# Altium PCB 继电器程控V2_3级.PcbDoc
Units mm, origin at the board's own origin, x right, y up, seen from the top; angles counter-clockwise.
Board outline 58 x 38 mm, 2 copper layers (Top Layer, Bottom Layer); 53 components, 31 nets, 148 pads, 0 vias.
Unrouted connection lines stored in the file: 108.
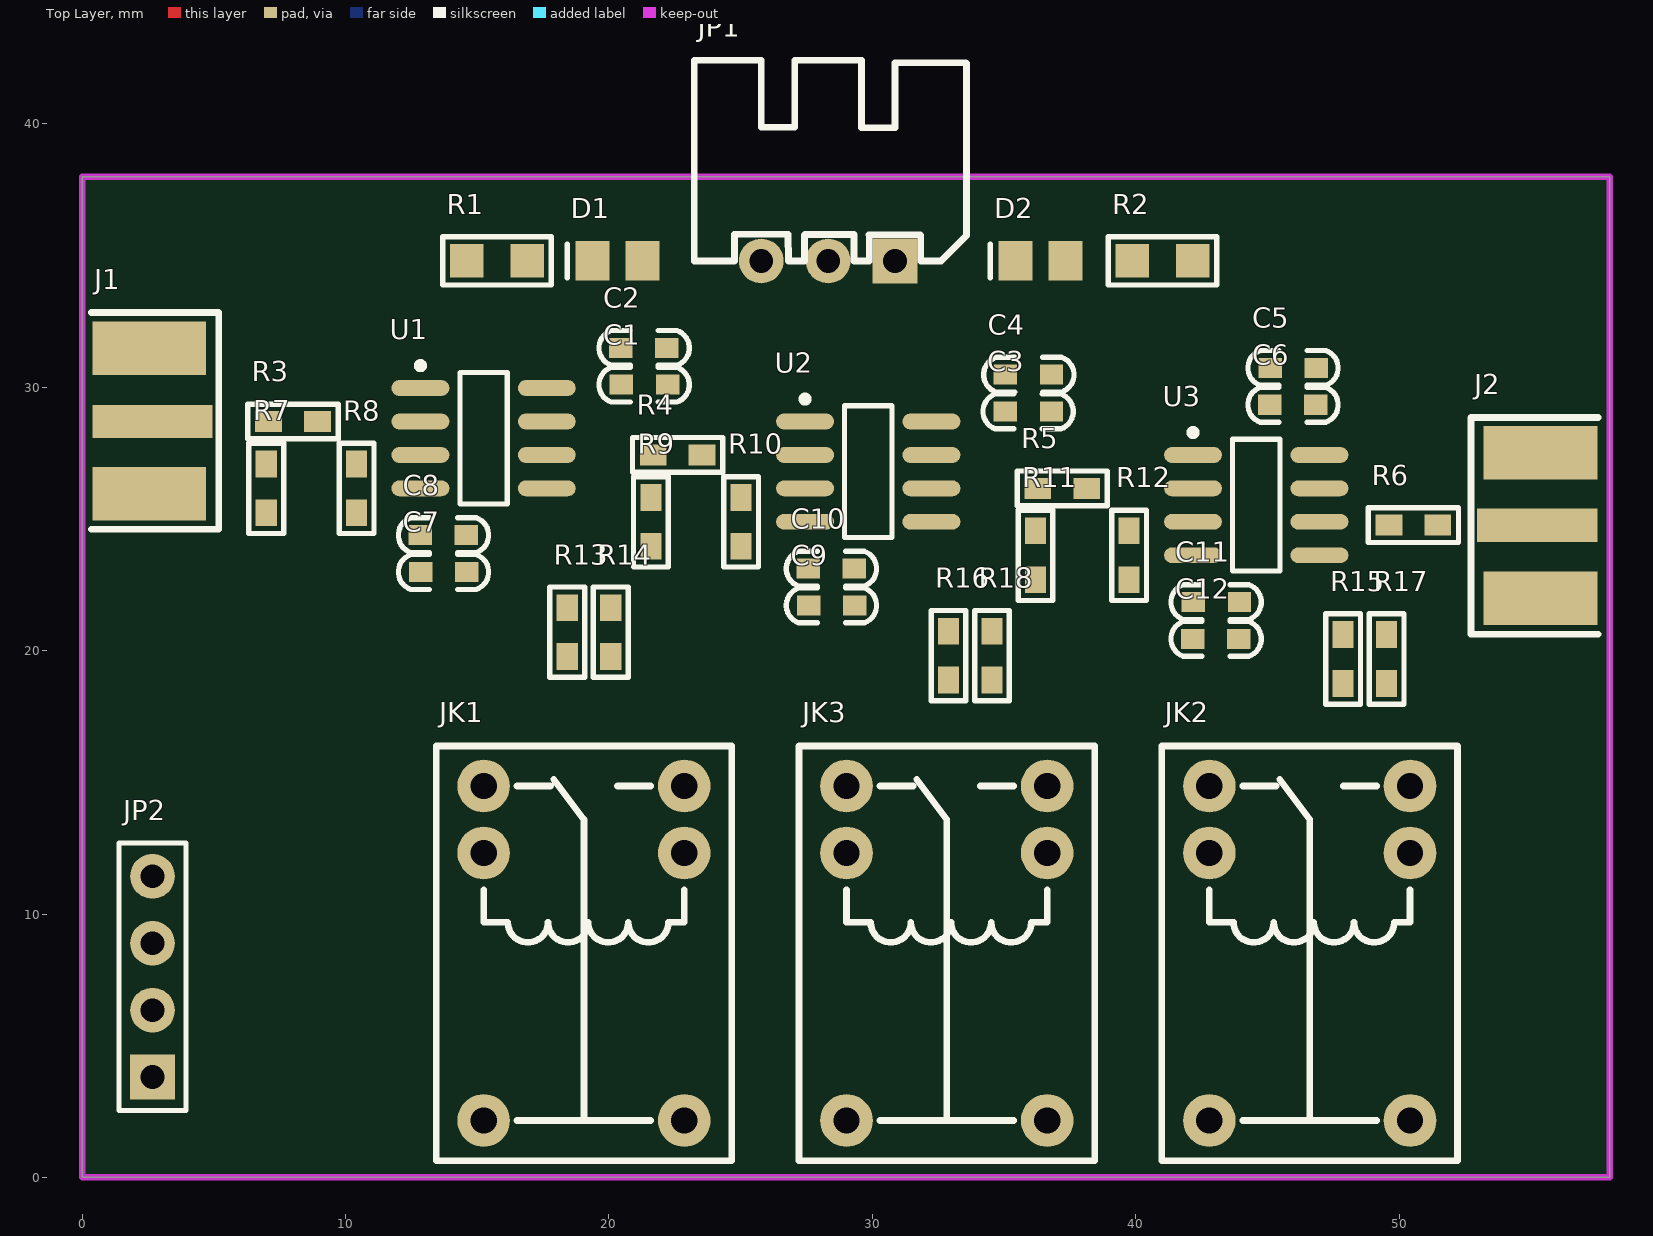
[diagram p0: Top Layer view]
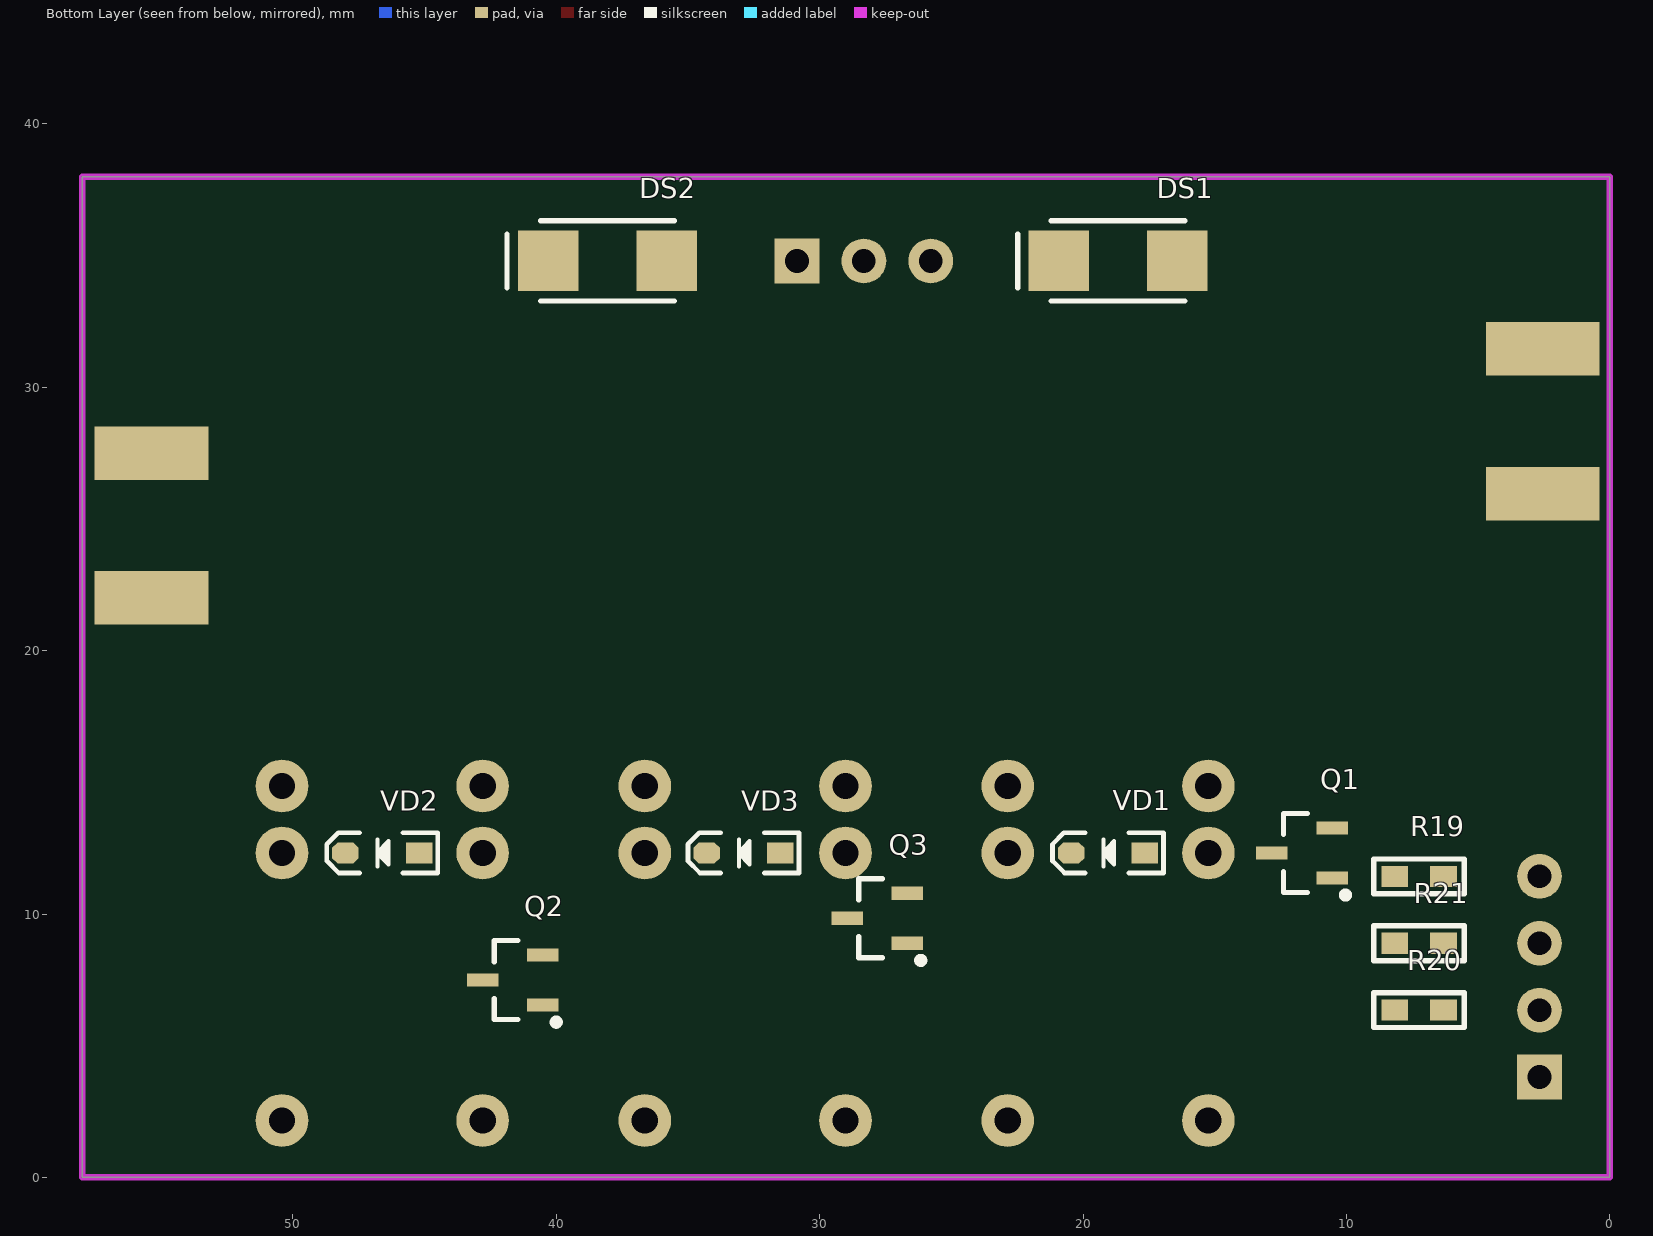
[diagram p1: Bottom Layer view, seen from below]

## Layer stack, top to bottom
Top Solder: solder mask 0.0102, Solder Resist, Dk 3.5
Top Layer: signal copper 0.0356
Dielectric 1: dielectric 0.32, FR-4, Dk 4.8
Bottom Layer: signal copper 0.0356
Bottom Solder: solder mask 0.0102, Solder Resist, Dk 3.5

## Board outline
0,0 0,38 58,38 58,0

## Design rules (kind name [scope] priority, off if disabled: settings)
Clearance [All] p1: gap=0.254 ignorepadtopadclearanceinfootprint=FALSE except(0: Arc-Hole Track-Hole SMDPad-Hole THPad-Hole Via-Hole Fill-Hole Poly-Text Poly-Hole Region-Hole Text-Hole; 0.508: Arc-Poly Track-Poly SMDPad-Poly THPad-Poly Via-Poly Fill-Poly Poly-Poly)
MinimumSolderMaskSliver [All] p1: minsoldermaskwidth=0
PolygonConnect [All] p1: connectstyle=Relief reliefconductorwidth=0.254 reliefentries=4 polygonreliefangle="90 Angle" airgapwidth=0.254
RoutingVias [All] p1: holewidth=0.711 width=1.27 viastyle="Through Hole" minholewidth=0.711 minwidth=1.27 maxholewidth=0.711 maxwidth=1.27
SilkToSilkClearance [All] p1: silktosilkclearance=0
SilkToSolderMaskClearance [IsPad] p1: minsilkscreentomaskgap=0 clearancetoexposedcopper=TRUE
SolderMaskExpansion [All] p1: expansion=0.102
Width [All] p1: maxlimit=2.54 minlimit=0.025 preferedwidth=0.254
27 further rules are at their usual default settings.

## Components (designator, comment, footprint, x,y, rotation, side; value= is the part's Value field where it differs from the comment)
C1 "104" "C 0603" 21.336,30.099 r180 top
C2 "1uF" "C 0603" 21.336,31.496 r0 top
C3 "104" "C 0603" 35.916,29.083 r180 top
C4 "1uF" "C 0603" 35.941,30.48 r0 top
C5 "104" "C 0603" 45.974,30.734 r180 top
C6 "1uF" "C 0603" 45.974,29.337 r0 top
C7 "104" "C 0603" 13.716,22.987 r180 top
C8 "1uF" "C 0603" 13.716,24.384 r0 top
C9 "104" "C 0603" 28.448,21.717 r180 top
C10 "1uF" "C 0603" 28.448,23.114 r0 top
C11 "104" "C 0603" 43.053,21.844 r180 top
C12 "1uF" "C 0603" 43.053,20.447 r0 top
D1 "LED" LED_0805 20.32,34.798 r180 top
D2 "LED" LED_0805 36.383,34.798 r180 top
DS1 "D Schottky" DIODE-SMA 18.669,34.798 r0 bottom
DS2 "D Schottky" DIODE-SMA 38.064,34.798 r0 bottom
J1 "COAX" MCX5.08-5-H 2.667,28.702 r0 top
J2 "COAX" MCX5.08-5-H 55.245,24.765 r180 top
JK1 "HK4100F-DC5V-SHG" HK4100F 19.05,8.509 r270 top
JK2 "HK4100F-DC5V-SHG" HK4100F 46.609,8.509 r270 top
JK3 "HK4100F-DC5V-SHG" HK4100F 32.829,8.509 r270 top
JP1 "HDR-1X3" XH2.54-3P_H 30.861,34.798 r180 top
JP2 "HDR-1X4" HDR-1X4 2.667,3.81 r90 top
Q1 "S9013" SOT23-3N 11.684,12.319 r90 bottom
Q2 "S9013" SOT23-3N 41.656,7.493 r90 bottom
Q3 "S9013" SOT23-3N 27.813,9.84 r90 bottom
R1 "1K" "R 0805" 15.748,34.798 r180 top
R2 "1K" "R 0805" 41.021,34.798 r180 top
R3 "200" "R 0603" 8.001,28.702 r180 top
R4 "1K" "R 0603" 22.606,27.432 r180 top
R5 "1K" "R 0603" 37.211,26.162 r180 top
R6 "50" "R 0603" 50.546,24.765 r180 top
R7 "67" "R 0603" 6.985,26.162 r270 top
R8 "146" "R 0603" 10.414,26.162 r90 top
R9 "67" "R 0603" 21.59,24.892 r270 top
R10 "146" "R 0603" 25.019,24.892 r270 top
R11 "67" "R 0603" 36.195,23.622 r270 top
R12 "146" "R 0603" 39.751,23.622 r270 top
R13 "800" "R 0603" 18.415,20.701 r90 top
R14 "1K" "R 0603" 20.066,20.701 r90 top
R15 "1K" "R 0603" 47.879,19.685 r270 top
R16 "500" "R 0603" 32.893,19.812 r270 top
R17 "5K" "R 0603" 49.53,19.685 r270 top
R18 "5K" "R 0603" 34.544,19.812 r270 top
R19 "1K" "R 0603" 7.239,11.43 r0 bottom
R20 "1K" "R 0603" 7.239,6.35 r0 bottom
R21 "1K" "R 0603" 7.239,8.89 r0 bottom
U1 "OPA690" SOIC8_N 15.24,28.067 r0 top
U2 "OPA690" SOIC8_N 29.845,26.797 r0 top
U3 "OPA690" SOIC8_N 44.577,25.527 r0 top
VD1 "1N4148" SOD-323 19.05,12.319 r0 bottom
VD2 "1N4148" SOD-323 46.609,12.319 r0 bottom
VD3 "1N4148" SOD-323 32.893,12.319 r0 bottom

## Footprints (in the part's own frame and the unit in brackets; to place one, negate y for a bottom-side part, rotate by r counter-clockwise, add the part's x,y. Pads: shape width x height; smd on the part's side, far side on the other; paste and mask are expansions set on the pad)
"C 0603" [mil] "无极性贴片电容"
  rect 35x30 smd: 1(-35,0) 2(34,0)
  silkscreen extent -67,-26 67,26, body extent -31,-16 31,16, height 32
DIODE-SMA [mm] "贴片二极管"
  rect 2.3x2.3 smd: 1(-2.25,0) 2(2.25,0)
  silkscreen extent -2.54,-1.52 3.81,1.52, body extent -2.92,-1.4 2.92,1.4, height 3
HDR-1X4 [mm] "排针，4脚"
  rect 1.7x1.7 hole 0.9: 1(0,0)
  round 1.7 hole 0.9: 2(2.54,0) 3(5.08,0) 4(7.62,0)
  silkscreen extent -1.27,-1.27 8.89,1.27, body extent -1.27,-1.27 8.89,1.27, height 8.5
HK4100F [mm] "继?"
  round 2 hole 1: 1(-3.81,3.81) 2(-3.81,-3.81) 3(6.35,3.81) 3(6.35,-3.81) 4(-6.35,3.81) 5(-6.35,-3.81)
  silkscreen extent -7.87,-5.61 7.87,5.61, body extent -7.75,-5.5 7.75,5.5, height 12.2
LED_0805 [mm] "贴片二极管"
  rect 1.3x1.5 smd: 1(-0.95,0) 2(0.95,0)
  silkscreen extent 1.91,-0.63 1.91,0.64
MCX5.08-5-H [mil]
  rect 180x50 smd: 1(0,0)
  rect 170x80 smd: 2(-5,109.25) 5(-5,-108.27)
  rect 170x80 smd far side: 3(-5,108.66) 4(-5,-107.87)
  silkscreen extent -92,-161 99,163, body extent -93,-132 80,134, height 39
"R 0603" [mil] "1/10W贴片电阻"
  rect 40x31.5 smd: 1(-36.5,0) 2(36.5,0)
  silkscreen extent -68,-26 68,26, body extent -31,-16 32,16, height 16
"R 0805" [mil] "1/8W贴片电阻"
  rect 50x50 smd: 1(-45,0) 2(45,0)
  silkscreen extent -81,-36 81,36, body extent -39,-25 39,25, height 20
SOD-323 [mm] "1.8x1.3X0.9mm（长宽高，不包括引脚）"
  rect 1x0.8 smd: 1(-1.4,0)
  oct 1x0.8 smd: 2(1.4,0)
  silkscreen extent -2.11,-0.76 2.11,0.76, body extent -1.34,-0.63 1.31,0.67, height 1
SOIC8_N [mm] "8-Pin Small Outline Integrated Circuit Package (SOIC8), IPC Medium Density"
  oval 2.2x0.6 smd: 1(-2.4,1.905) 2(-2.4,0.635) 3(-2.4,-0.635) 4(-2.4,-1.905) 5(2.4,-1.905) 6(2.4,-0.635) 7(2.4,0.635) 8(2.4,1.905)
  silkscreen extent -2.52,-2.5 0.9,2.88, body extent -1.95,-2.45 1.95,2.45, height 1.75
SOT23-3N [mm] "3x1.3x1mm(长宽高)"
  rect 0.5x1.2 smd: 1(-0.95,-1.143) 2(0.95,-1.143) 3(0,1.143)
  silkscreen extent -1.72,-1.78 1.5,0.7, body extent -1.5,-1.2 1.5,1.2, height 1.05
XH2.54-3P_H [mm] "接插件，3P"
  rect 1.7x1.7 hole 0.9: 1(0,0)
  round 1.7 hole 0.9: 2(2.54,0) 3(5.08,0)
  silkscreen extent -2.72,-7.62 7.62,0, body extent -2.5,-7.35 7.58,0.35, height 5.73

## Part data
C1 C2 C3 C4 C5 C6 C7 C8 C9 C10 C11 C12: library part C, "无极性贴片电容"
D1 D2: "发光二极管", LatestRevisionDate=08-Jul-2005, LatestRevisionNote="Mech Layer 1 removed.", PackageReference=LED, Published=8-Jun-2000, Publisher="Altium Limited"
DS1 DS2: "Schottky Diode", Code_JEDEC=DO-214-AA, LatestRevisionDate=17-Jul-2002, LatestRevisionNote="Re-released for DXP Platform.", PackageDescription="DO-214-AA/SMB; 2 C-Bend Leads; Body 5.3 x 3.6 mm, inc. leads (LxW)", PackageReference=SMB, Published=8-Jun-2000, Publisher="Altium Limited"
JK1 JK2 JK3: library part HK4100F, "单路双控继电器"
JP1: library part "Header 3", "3P接插件", BOM名称=3P接, 学习资源=www.ooocke.
JP2: library part "Header 4", "4P接插件"
Q1 Q2 Q3: library part 9013-SMD, "低频放大-NPN型"
R1 R2 R3 R4 R5 R6 R7 R8 R9 R10 R11 R12 R13 R14 R15 R16 R17 R18 R19 R20 R21: library part R, "贴片电阻"
U1 U2 U3: library part OPA690ID, "具有禁用功能的宽带电压反馈运算放大器"
VD1 VD2 VD3: "高速开关二极管"

## Nets (pads, with @x,y where several pads share a name; then routed paths per layer and width w, separated by ;. In a path a pad name is that pad's centre, name@x,y a point inside that pad or via, vN(x,y) a via of type N, cw(c..) or ccw(c..) an arc to the next point about the centre after c; other vN are vias at no path point)
CON1: JP2.4 R19.1
CON2: JP2.3 R21.1
CON3: JP2.2 R20.1
GND: C1.1 C2.2 C3.1 C4.2 C5.1 C6.2 C7.1 C8.2 C9.1 C10.2 C11.1 C12.2 DS1.1 DS2.2 J1.2 J1.3 J1.4 J1.5 J2.2 J2.3 J2.4 J2.5 JP1.2 JP2.1 Q1.2 Q2.2 Q3.2 R1.2 R2.1 R7.2 R8.1 R9.2 R10.2 R11.2 R12.2
NetD1_2: D1.2 R1.1
NetD2_1: D2.1 R2.2
NetJ1_1: J1.1 R3.2 R7.1
NetJ2_1: J2.1 R6.1
NetJK1_2: JK1.2 Q1.3 VD1.1
NetJK1_3: JK1.3 R3.1 U1.2
NetJK1_4: JK1.4 R14.1
NetJK1_5: JK1.5 R13.1
NetJK2_2: JK2.2 Q2.3 VD2.1
NetJK2_3: JK2.3 R5.1 U3.2
NetJK2_4: JK2.4 R17.2
NetJK2_5: JK2.5 R15.2
NetJK3_2: JK3.2 Q3.3 VD3.1
NetJK3_3: JK3.3 R4.1 U2.2
NetJK3_4: JK3.4 R18.2
NetJK3_5: JK3.5 R16.2
NetQ1_1: Q1.1 R19.2
NetQ2_1: Q2.1 R20.2
NetQ3_1: Q3.1 R21.2
NetR4_2: R4.2 R9.1 R13.2 R14.2 U1.6
NetR5_2: R5.2 R11.1 R16.1 R18.1 U2.6
NetR6_2: R6.2 R15.1 R17.1 U3.6
NetR8_2: R8.2 U1.3
NetR10_1: R10.1 U2.3
NetR12_1: R12.1 U3.3
VCC: C1.2 C2.1 C3.2 C4.1 C5.2 C6.1 D1.1 DS1.2 JK1.1 JK2.1 JK3.1 JP1.3 U1.7 U2.7 U3.7 VD1.2 VD2.2 VD3.2
VEE: C7.2 C8.1 C9.2 C10.1 C11.2 C12.1 D2.2 DS2.1 JP1.1 U1.4 U2.4 U3.4
pads on no net: U1.1 U1.5 U1.8 U2.1 U2.5 U2.8 U3.1 U3.5 U3.8

## Keep-outs
Keep-Out Layer:
  the board outline again, w0.254